# Altium PCB 高压小功率FOC驱动板.PcbDoc (part 1 of 2)
Units mm, origin at the board's own origin, x right, y up, seen from the top; angles counter-clockwise.
Board outline 64 x 64 mm, 4 copper layers (Top Layer, Mid-Layer 1, Mid-Layer 2, Bottom Layer), stack 2.282 mm thick; 170 components, 96 nets, 418 pads, 185 vias.
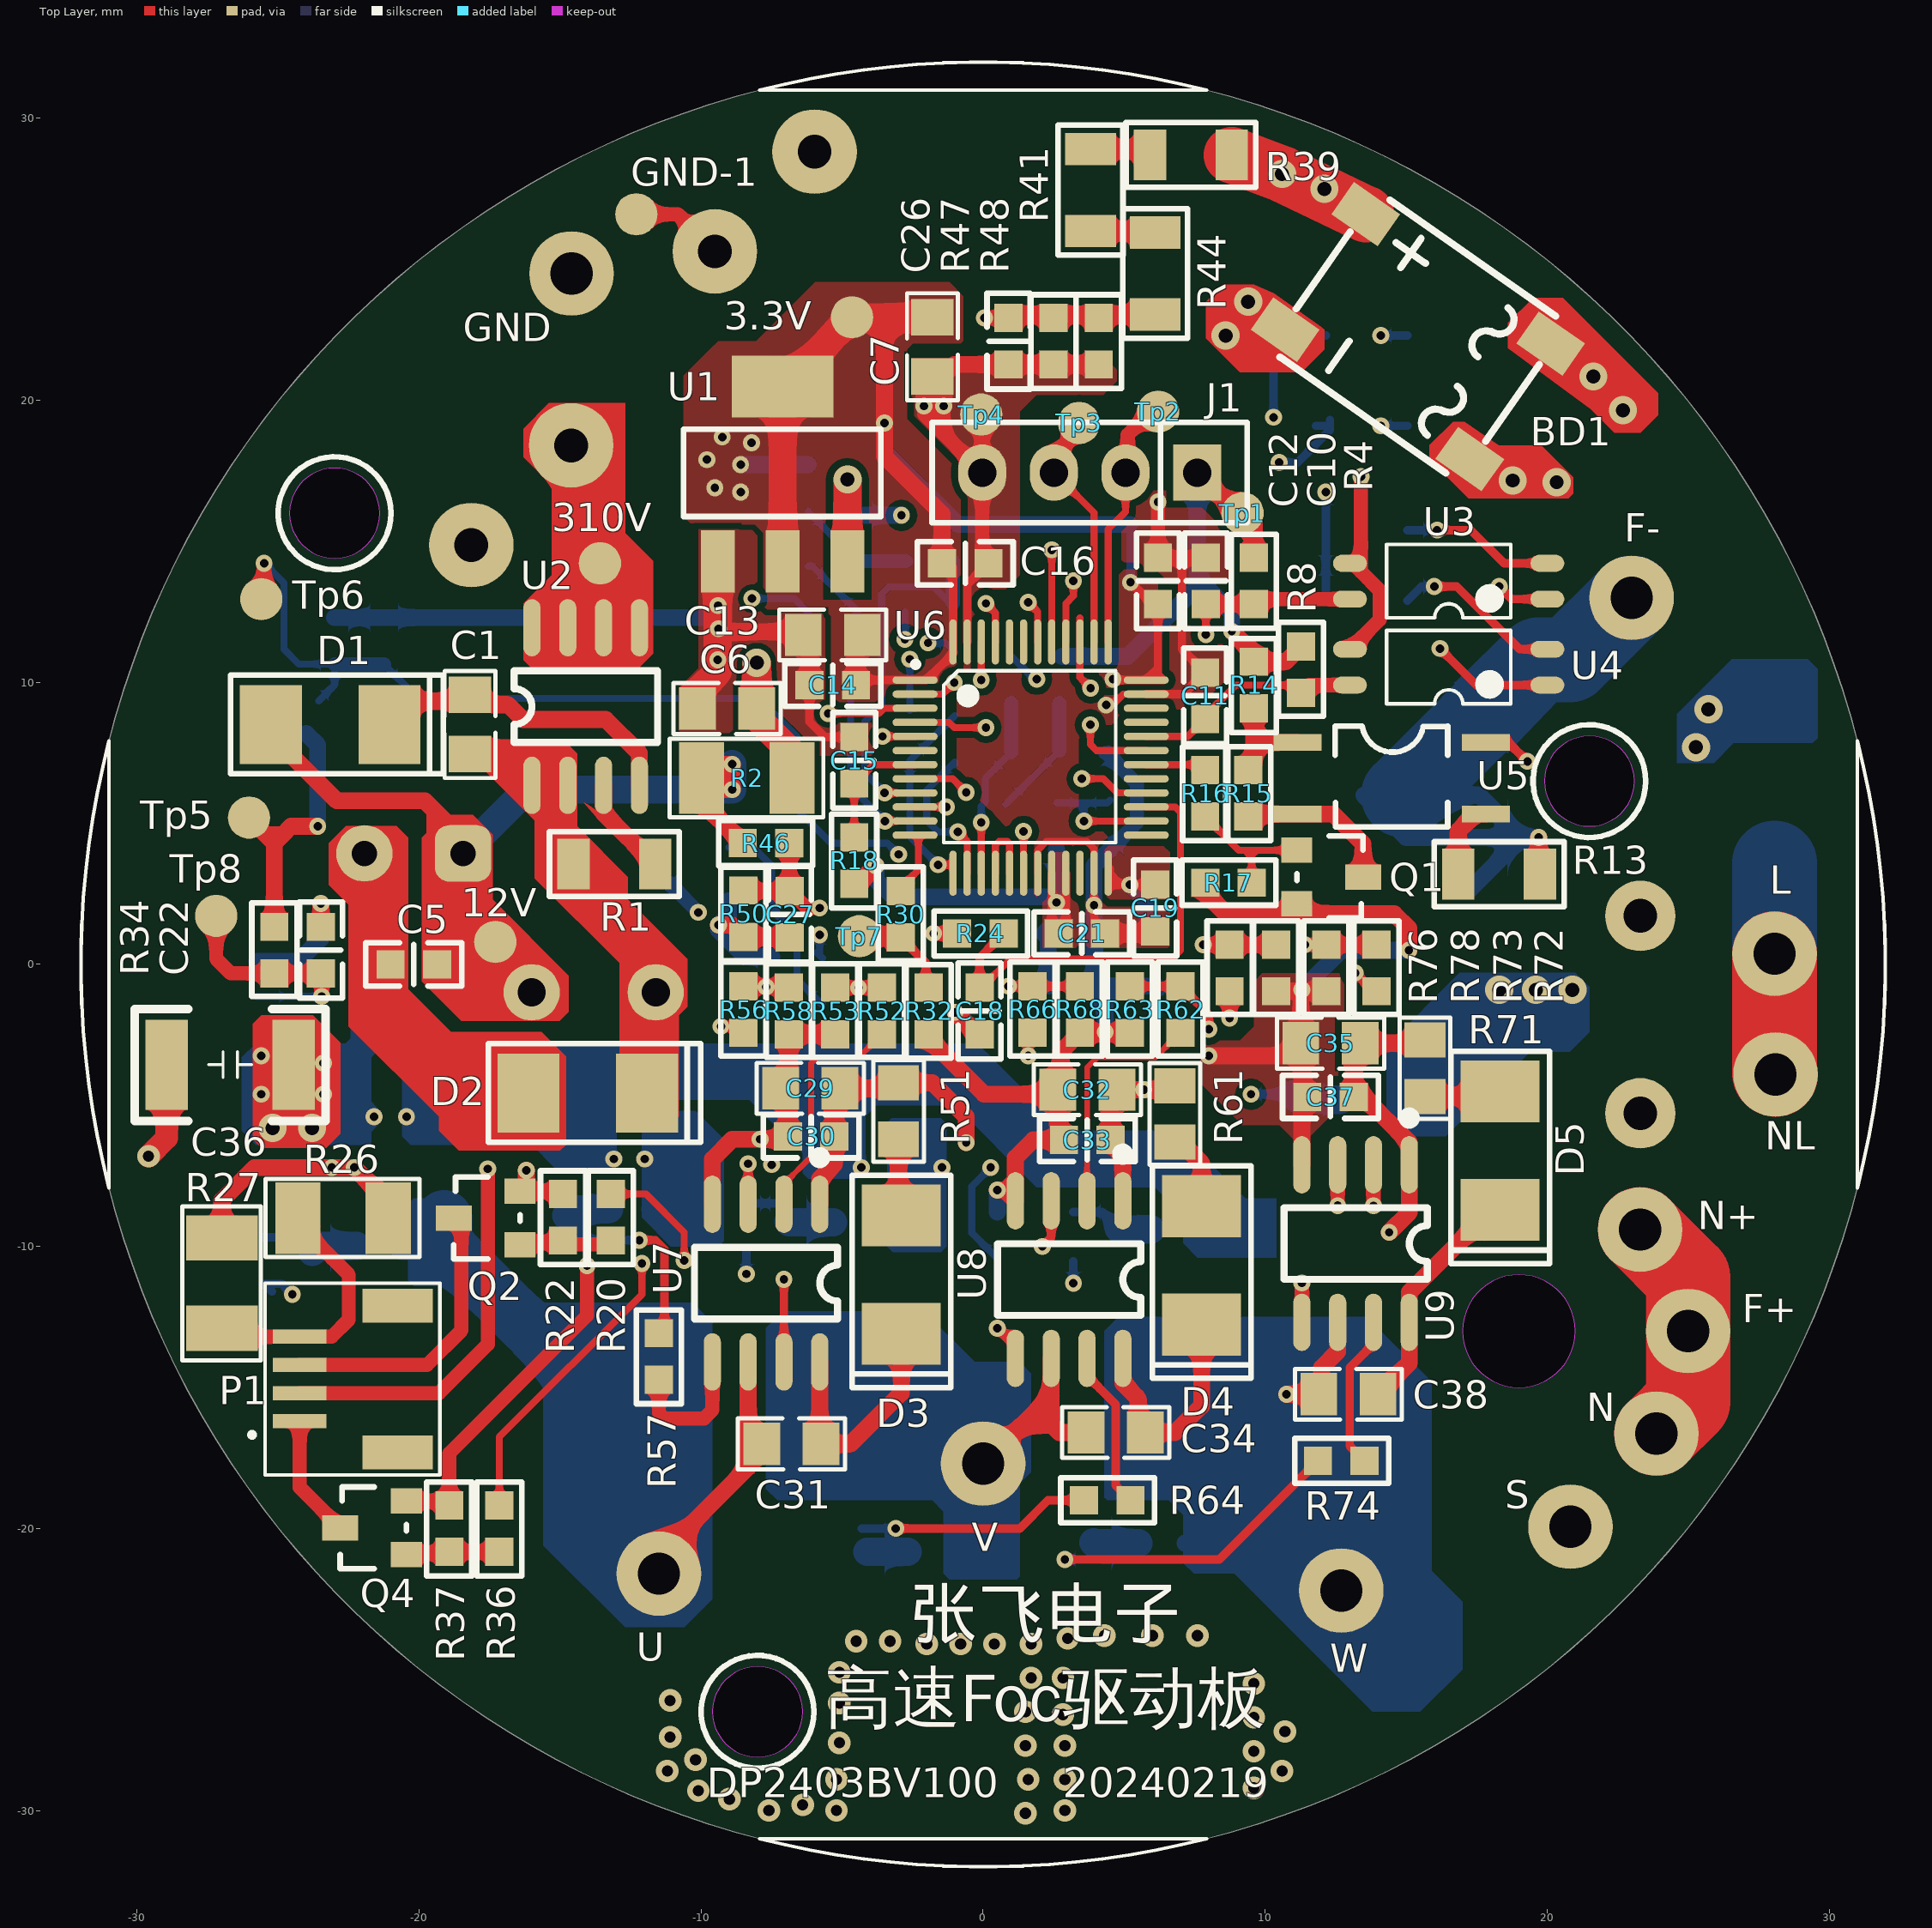
[diagram p0: Top Layer view]
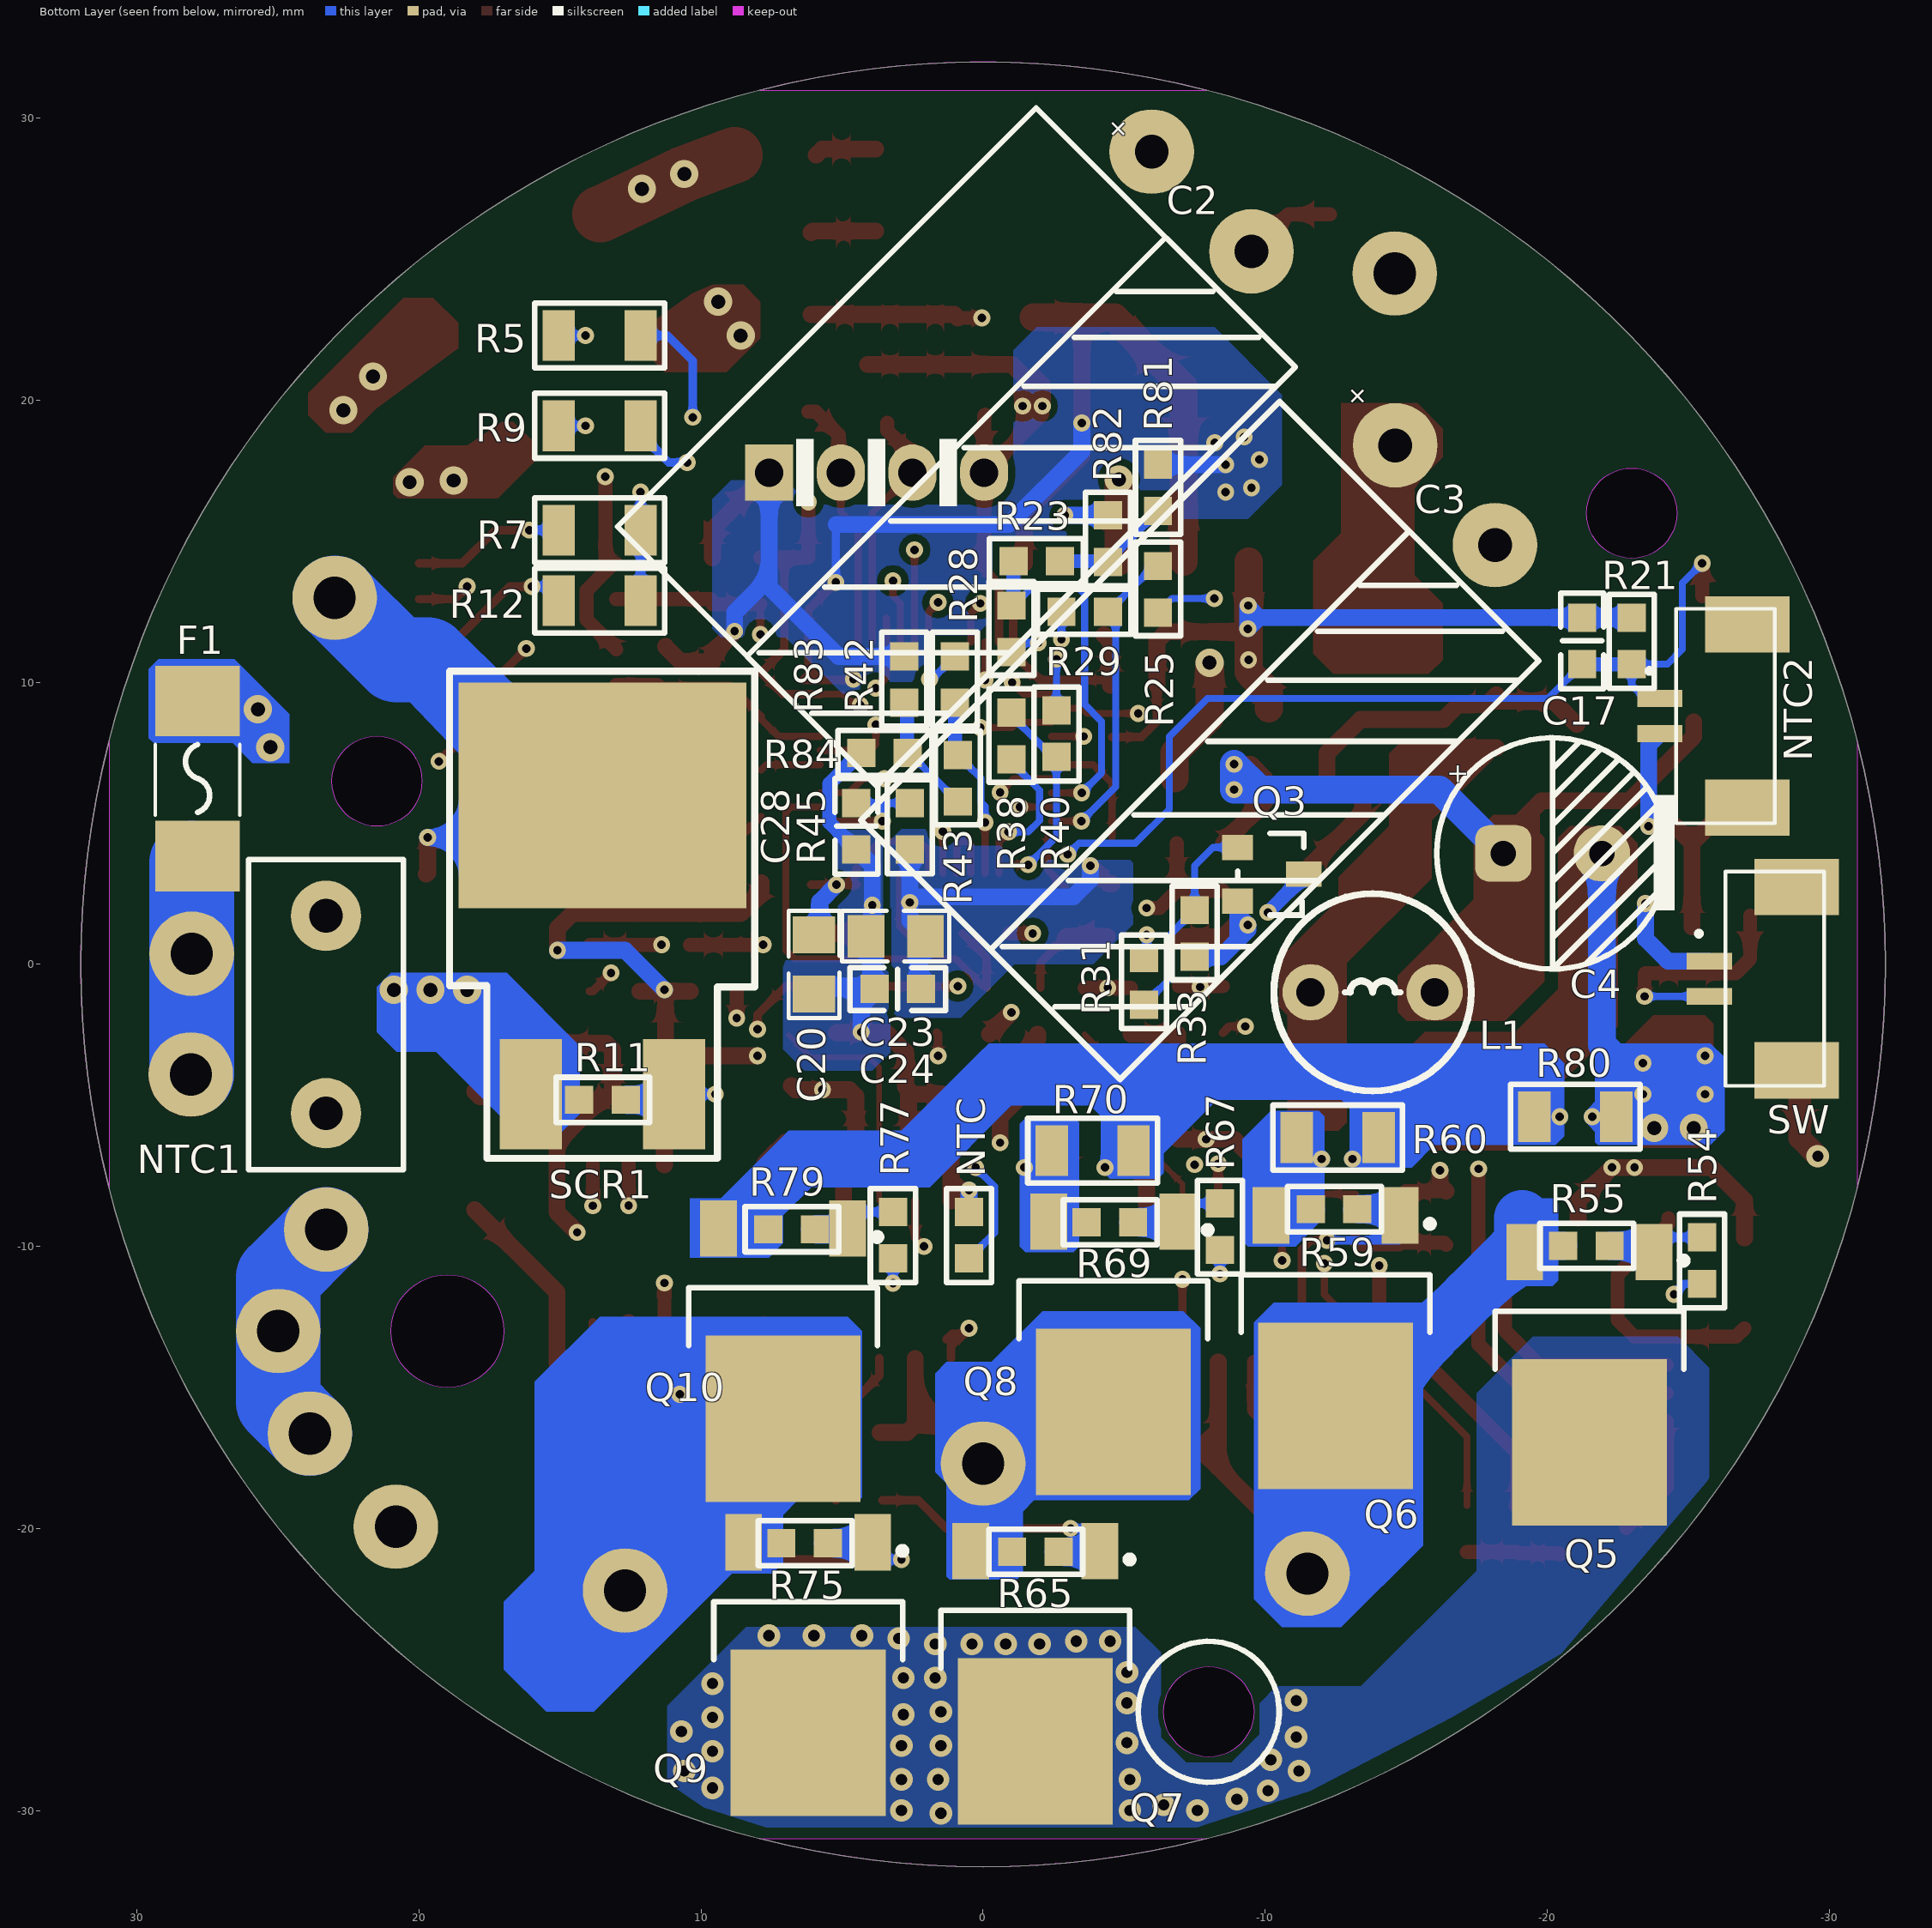
[diagram p1: Bottom Layer view, seen from below]
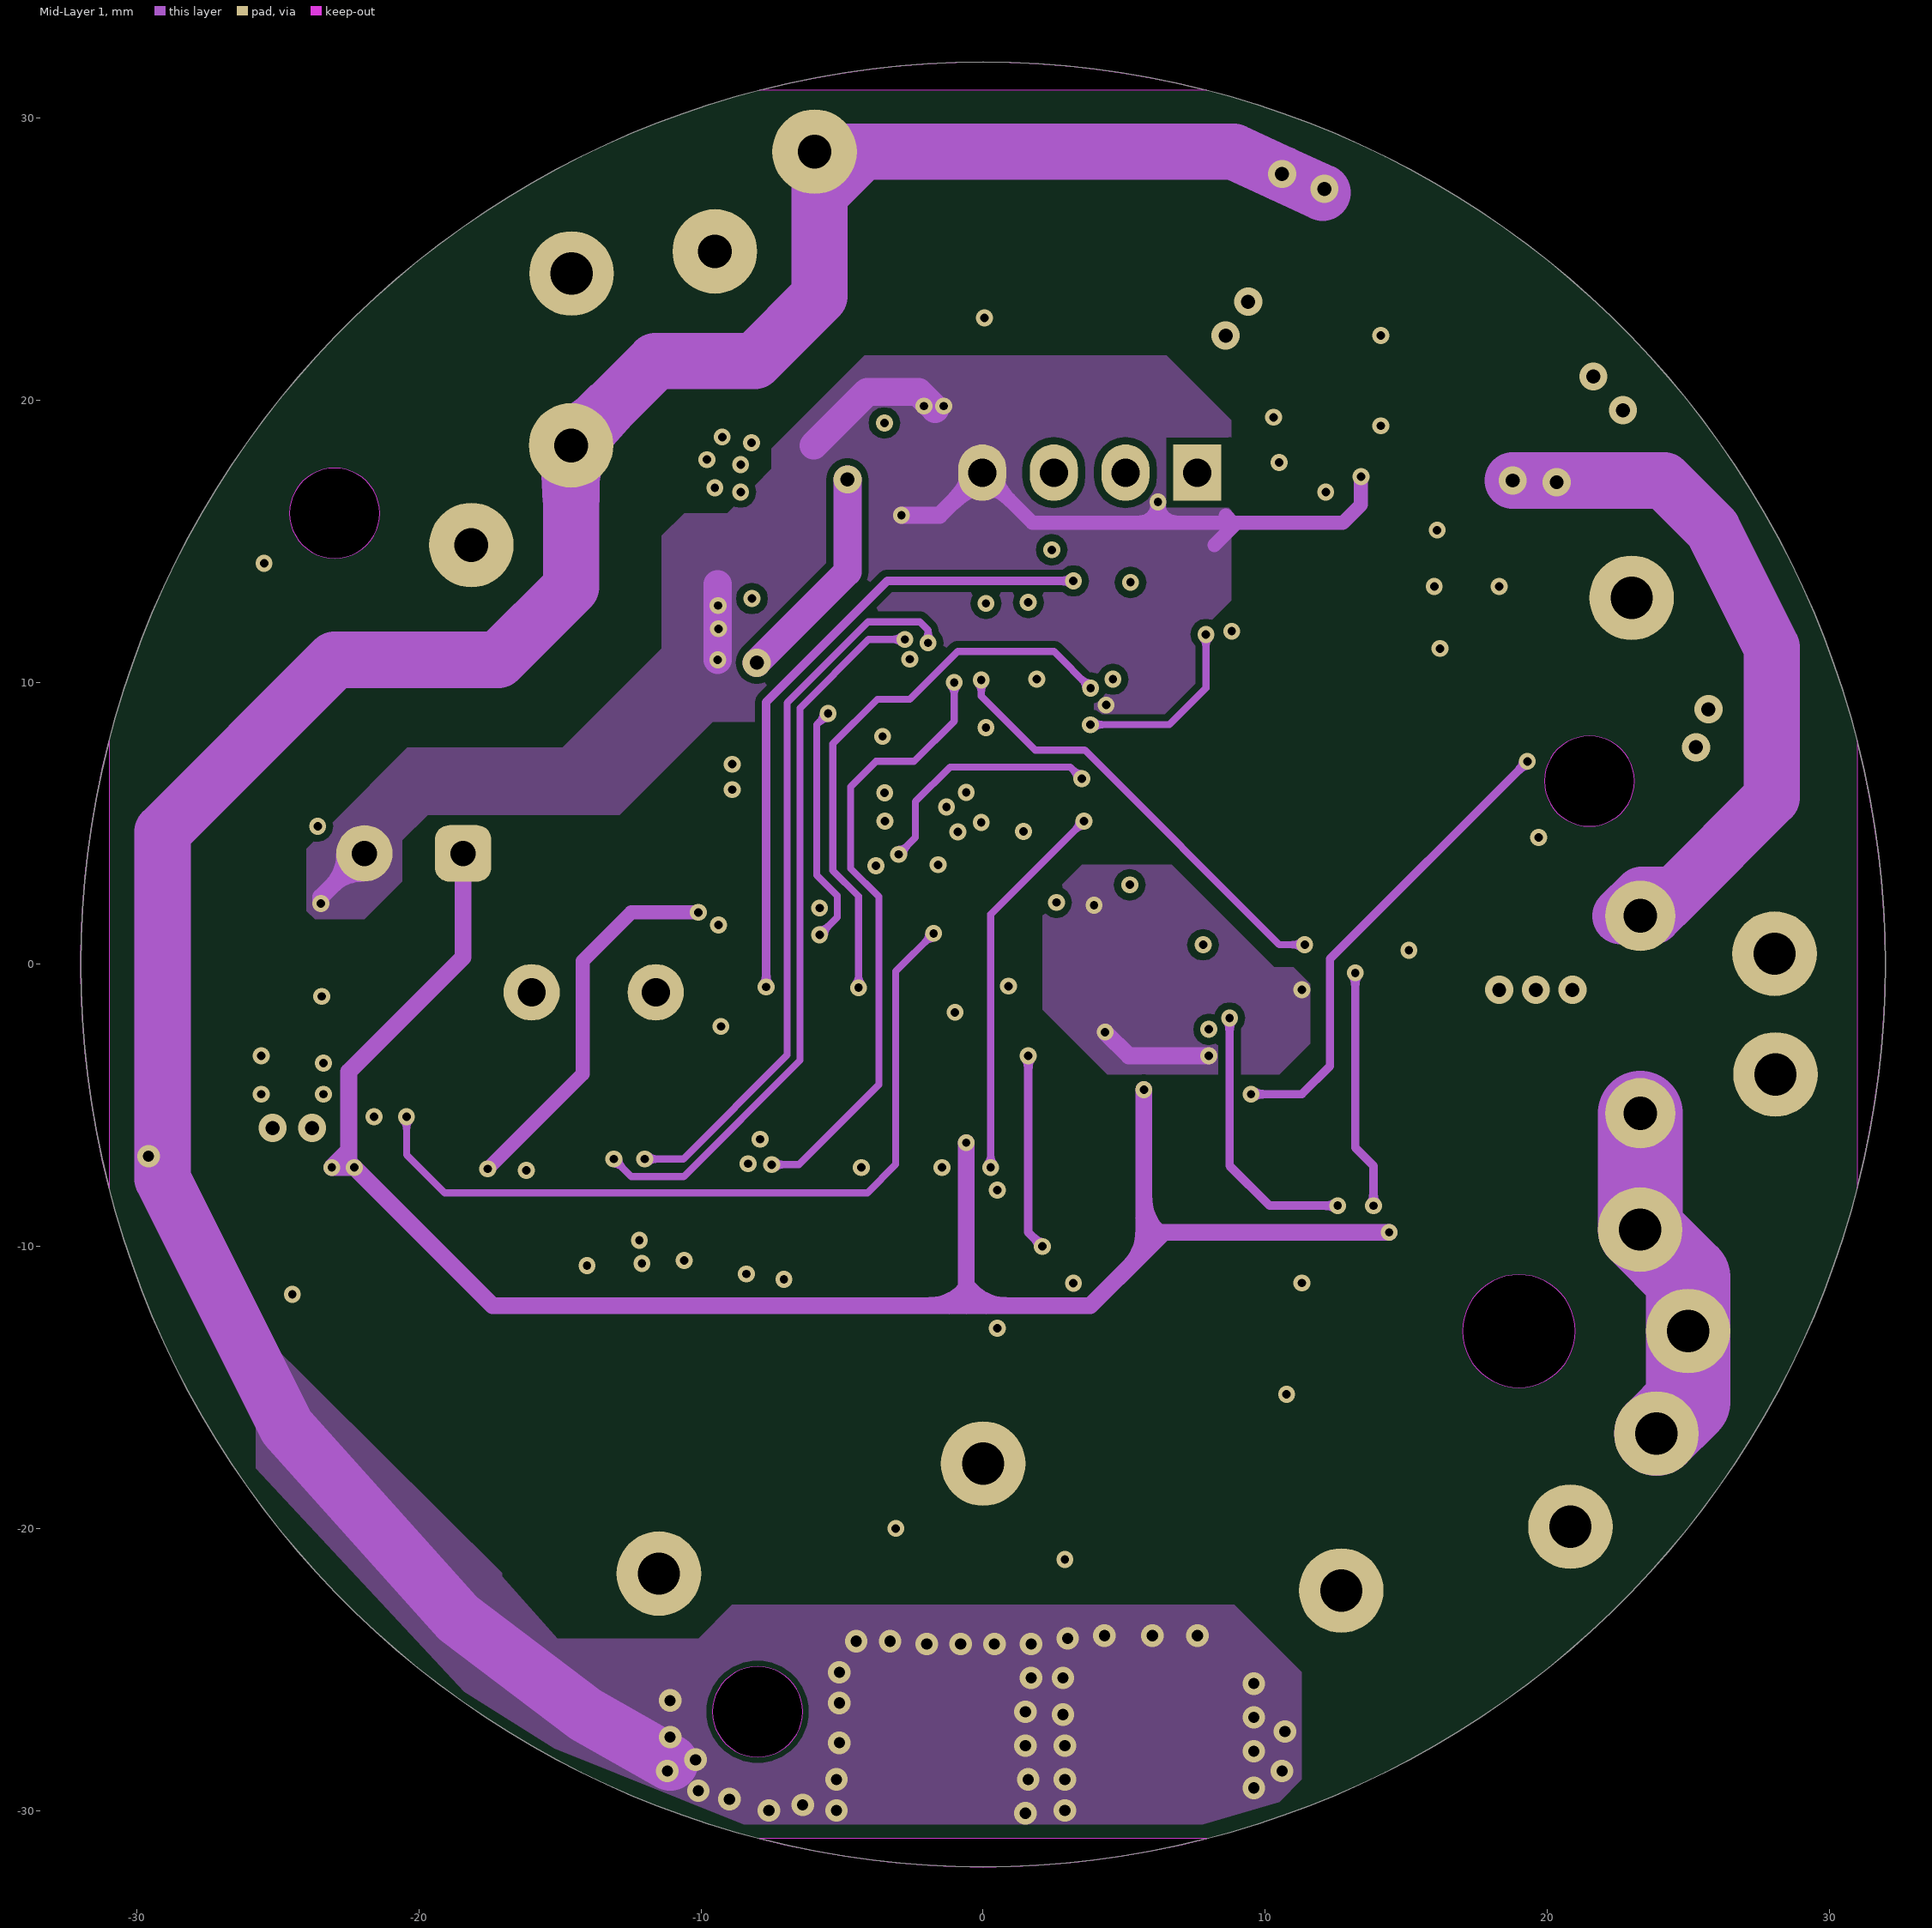
[diagram p2: Mid-Layer 1]
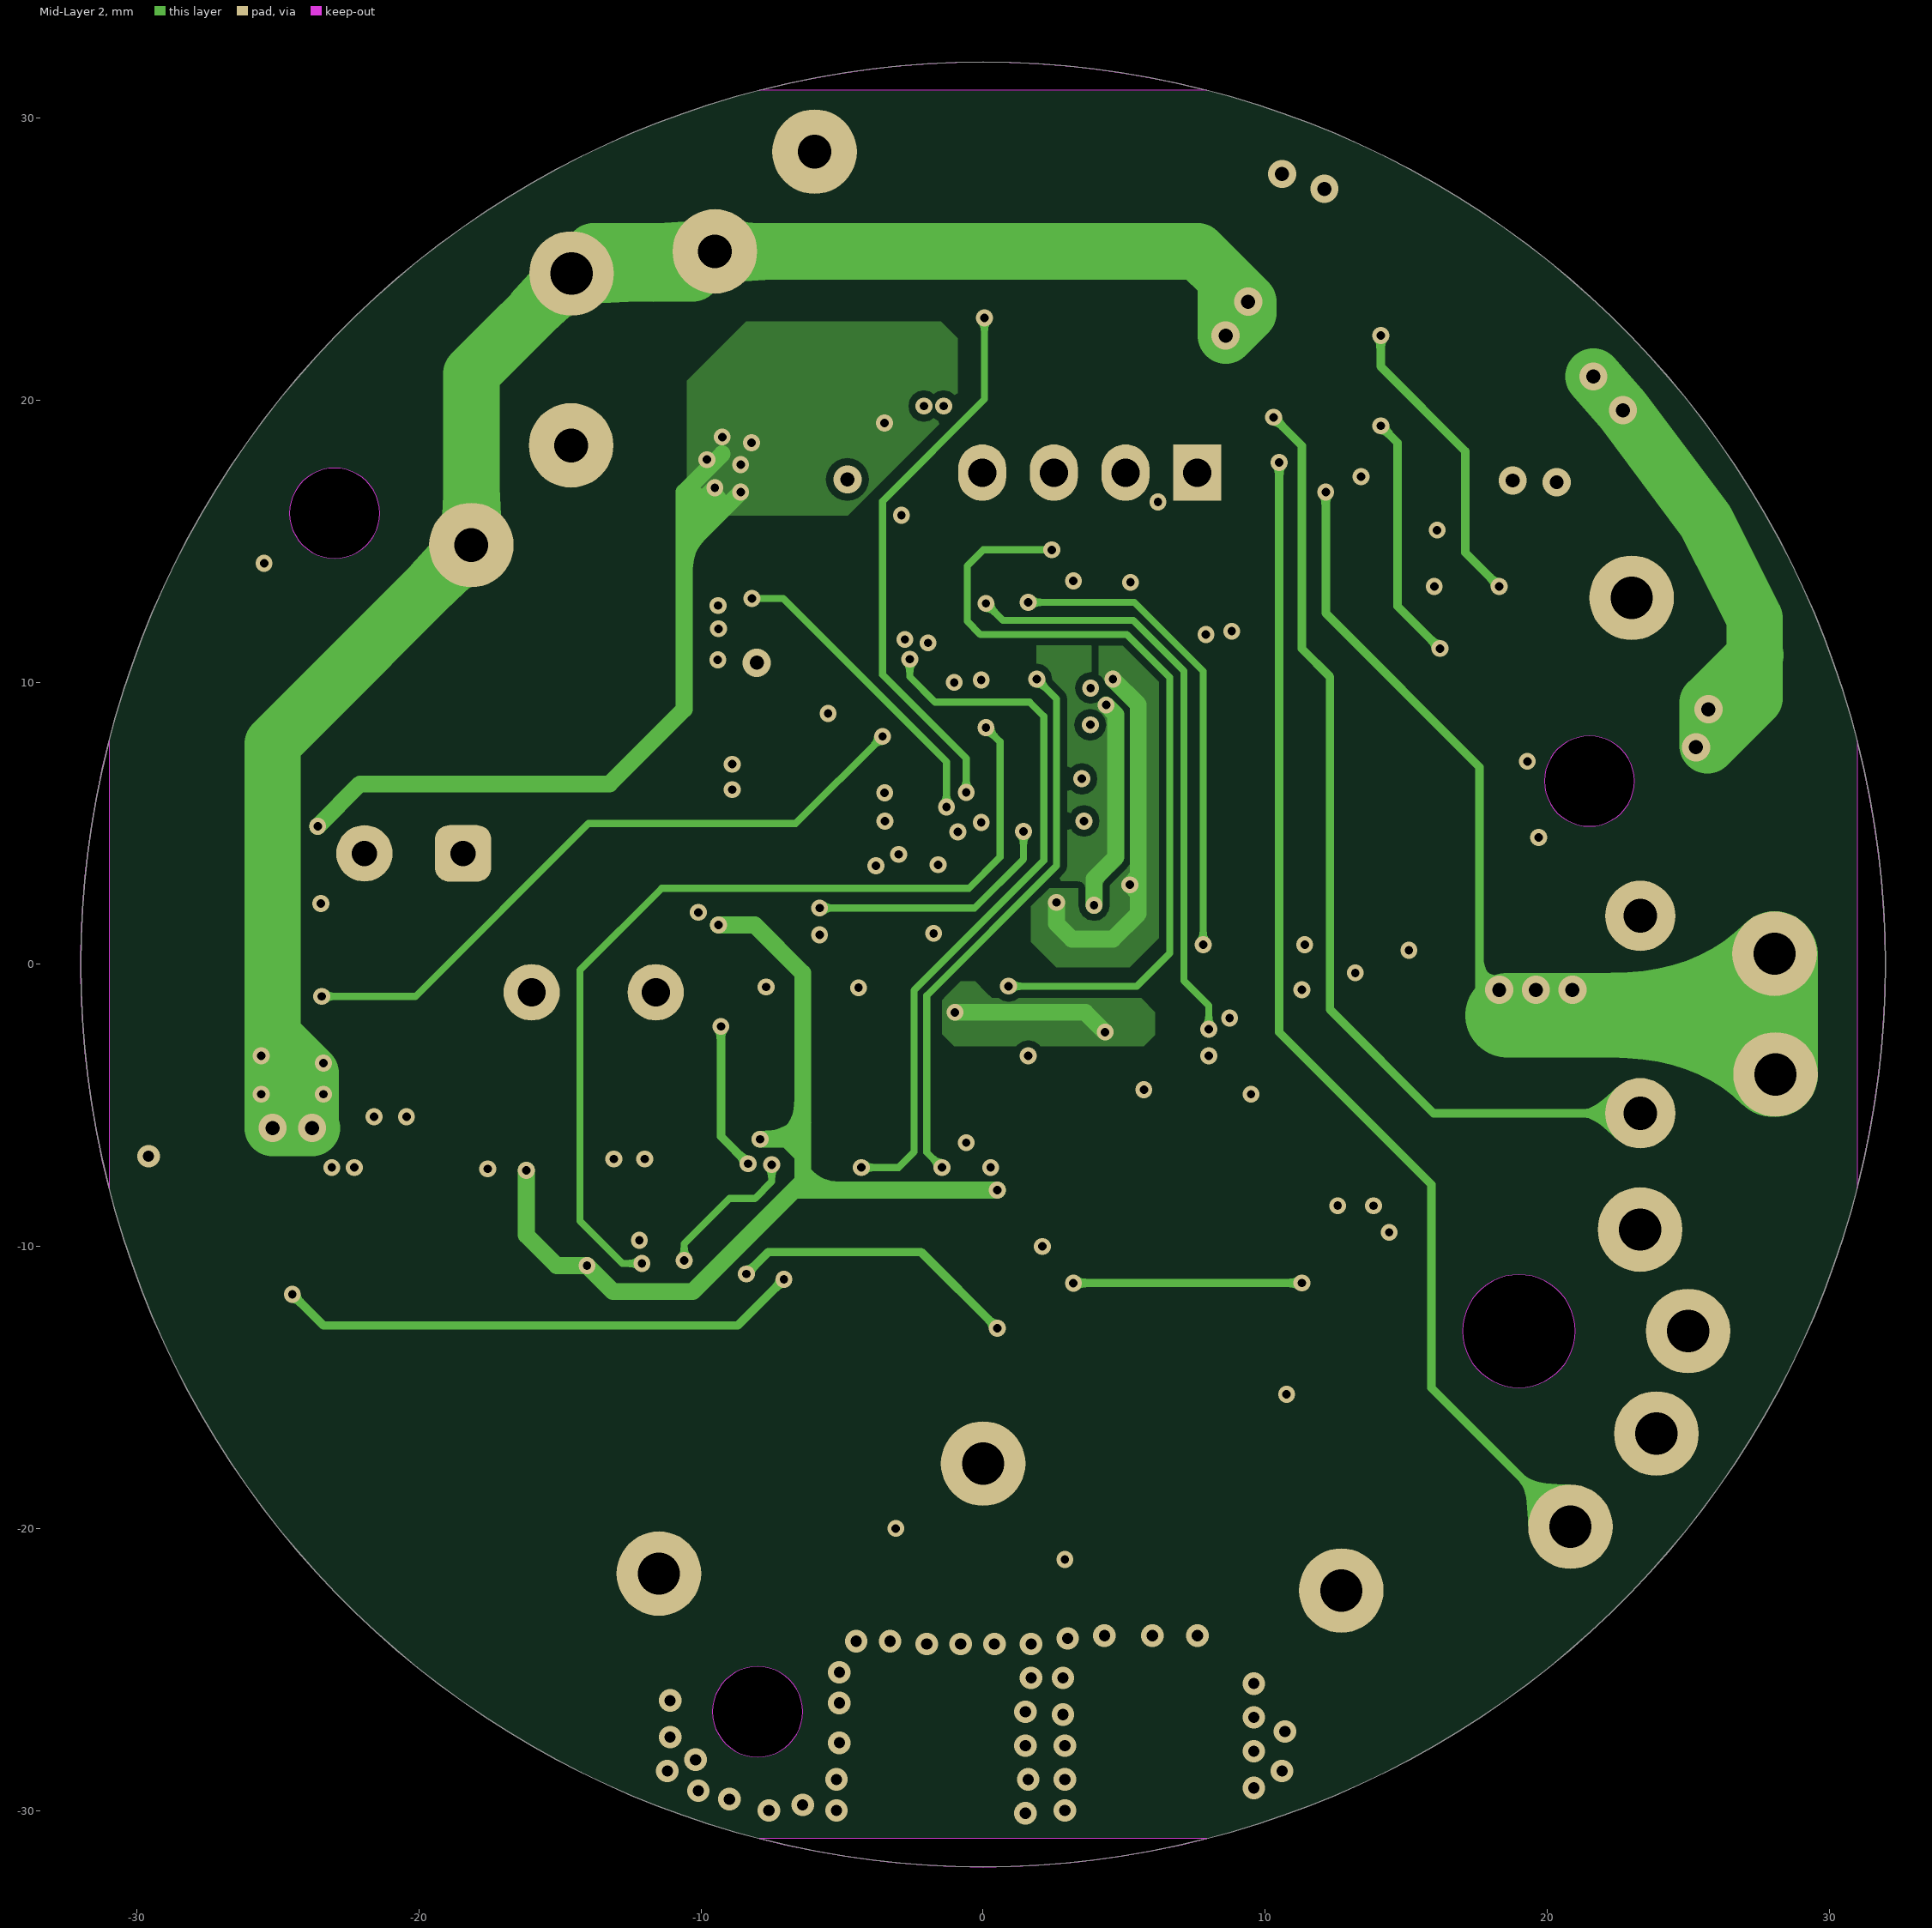
[diagram p3: Mid-Layer 2]

## Layer stack, top to bottom
Top Solder: solder mask 0.0102, Solder Resist, Dk 3.5
Top Layer: signal copper 0.0356
Dielectric1: core 1.5, FR-4, Dk 4.8
Mid-Layer 1: signal copper 0.0356
Dielectric2: prepreg 0.32, FR-4, Dk 4.8
Mid-Layer 2: signal copper 0.0356
Dielectric3: core 0.32, FR-4, Dk 4.8
Bottom Layer: signal copper 0.0356
Bottom Solder: solder mask 0.0102, Solder Resist, Dk 3.5

## Board outline
-32,0 ccw(c0,0) 0,-32 ccw(c0,0) 32,0 ccw(c0,0) 0,32 ccw(c0,0)
cut-out: -7.93,-31 ccw(c0,0) 7.93,-31
cut-out: -7.93,31 cw(c0,0) 7.93,31
cut-out: -31,-7.93 cw(c0,0) -31,7.93
cut-out: -24.6,16 ccw(c-23,16) -23,14.4 ccw(c-23,16) -21.4,16 ccw(c-23,16) -23,17.6 ccw(c-23,16)
cut-out: 19.9,6.5 ccw(c21.5,6.5) 21.5,4.9 ccw(c21.5,6.5) 23.1,6.5 ccw(c21.5,6.5) 21.5,8.1 ccw(c21.5,6.5)
cut-out: 17,-13 ccw(c19,-13) 19,-15 ccw(c19,-13) 21,-13 ccw(c19,-13) 19,-11 ccw(c19,-13)
cut-out: -9.6,-26.5 ccw(c-8,-26.5) -8,-28.1 ccw(c-8,-26.5) -6.4,-26.5 ccw(c-8,-26.5) -8,-24.9 ccw(c-8,-26.5)
cut-out: 31,-7.93 ccw(c0,0) 31,7.93

## Design rules (kind name [scope] priority, off if disabled: settings)
Clearance [All] p1: gap=0.2
ComponentClearance [All] p1 off: gap=0.254 collisioncheckmode=3 verticalgap=0.254 showdistances=FALSE
MinimumSolderMaskSliver [All] p1 off: minsoldermaskwidth=0.254
PolygonConnect [All] p1: connectstyle=Direct reliefconductorwidth=0.254 reliefentries=4 polygonreliefangle="90 Angle" airgapwidth=0.254
RoutingVias [All] p1: holewidth=0.4 width=0.8 viastyle="Through Hole" minholewidth=0.3 minwidth=0.6 maxholewidth=0.5 maxwidth=1
SilkToSilkClearance [All] p1 off: silktosilkclearance=0.254
SilkToSolderMaskClearance [IsPad] p1 off: minsilkscreentomaskgap=0.254 clearancetoexposedcopper=TRUE
SolderMaskExpansion [All] p1: expansion=0.102
Width [All] p1: maxlimit=3 minlimit=0.2 preferedwidth=0.254
26 further rules are at their usual default settings.

## Classes and differential pairs
component class U_3-高压小功率FOC驱动板: C29 C30 C31 C32 C33 C34 C35 C36 C37 C38 D3 D4 D5 Q5 Q6 Q7 Q8 Q9 Q10 R51 R52 R53 R54 R55 R56 R57 R58 R59 R60 R61 R62 R63 R64 R65 R66 R67 R68 R69 R70 R71 R72 R73 R74 R75 R76 R77 R78 R79 R80 U U7 U8 U9 V W
component class U_2-高压小功率FOC驱动板: C12 C13 C14 C15 C16 C17 C18 C19 C20 C21 C22 C23 C24 C26 C27 C28 J1 NTC NTC2 P1 Q2 Q3 Q4 R18 R20 R21 R22 R23 R24 R25 R26 R27 R28 R29 R30 R31 R32 R33 R34 R36 R37 R38 R39 R40 R41 R42 R43 R44 R45 R46 R47 R48 R50 R81 R82 R83 R84 SW Tp1 Tp2 Tp3 Tp4 Tp5 Tp6 Tp7 Tp8 U6
component class U_1-高压小功率FOC驱动板: 3.3V 12V 310V BD1 C1 C2 C3 C4 C5 C6 C7 C10 C11 D1 D2 F1 F+ F- GND GND-1 L L1 N N+ NL NTC1 Q1 R1 R2 R4 R5 R7 R8 R9 R11 R12 R13 R14 R15 R16 R17 S SCR1 U1 U2 U3 U4 U5

## Components (designator, comment, footprint, x,y, rotation, side; value= is the part's Value field where it differs from the comment)
3.3V "test point" Test_Port -4.651,22.95 r90 top
12V "test point" Test_Port -17.3,0.8 r90 top
310V "test point" Test_Port -13.589,14.224 r90 top
BD1 "TMBF410" DBF 15.113,22.352 r55 top
C1 "4.7uF/50V" C0805 -18.2,8.509 r270 top
C2 "47uF/400V" D13/L21-5 -7.747,27.051 r225 bottom locked
C3 "47uF/400V" D13/L21-5 -16.383,16.637 r225 bottom locked
C4 "220uF/25V" RB3.5/8.2 -20.193,3.937 r180 bottom
C5 "100nF/50V" C0603 -20.193,0 r180 top
C6 "10uF/25V" C0805 -9.081,9.075 r0 top
C7 "10uF/25V" C0805 -1.8,21.9 r90 top
C10 "1nF/50V" C0603 7.9,13.6 r90 top
C11 "1nF/50V" C0603 7.874,9.525 r90 top
C12 "100nF/50V" C0603 6.2,13.6 r270 top
C13 "10uF/25V" C0805 -5.334,11.684 r0 top
C14 "100nF/50V" C0603 -5.334,9.906 r180 top
C15 "100nF/50V" C0603 -4.572,7.239 r90 top
C16 "100nF/50V" C0603 -0.635,14.224 r180 top
C17 "10nF/50V" C0603 -21.246,11.472 r270 bottom
C18 "4.7nF/50V" C0603 -0.127,-1.651 r270 top
C19 "100nF/50V" C0603 6.1,2 r90 top
C20 "10uF/25V" C0805 6,0 r270 bottom
C21 "10nF/50V" C0603 3.5,1.1 r180 top
C22 "1nF/50V" C0603 -23.487,0.508 r90 top
C23 "10uF/25V" C0805 3.1,1 r0 bottom
C24 "100nF/50V" C0603 3.029,-0.872 r180 bottom
C26 "10nF/50V" C0603 0.9,22.1 r270 top
C27 "1nF/50V" C0603 -6.858,1.778 r270 top
C28 "10nF/50V" C0603 4.5,4.9 r90 bottom
C29 "10uF/25V" C0805 -6.131,-4.391 r180 top
C30 "100nF/50V" C0603 -6.1,-6.1 r0 top
C31 "10uF/25V" C0805 -6.8,-17 r180 top
C32 "10uF/25V" C0805 3.694,-4.445 r180 top
C33 "100nF/50V" C0603 3.694,-6.223 r0 top
C34 "10uF/25V" C0805 4.7,-16.6 r180 top
C35 "10uF/25V" C0805 12.319,-2.794 r180 top
C36 "100nF/1000V" C1812 -28.956,-3.556 r0 top
C37 "100nF/50V" C0603 12.319,-4.699 r0 top
C38 "10uF/25V" C0805 12.954,-15.24 r180 top
D1 "ES1J" DO-214AC(SMA) -23.157,8.509 r0 top
D2 "ES1J" DO-214AC(SMA) -14.023,-4.561 r0 top
D3 "ES1J" DO-214AC(SMA) -2.9,-11 r270 top
D4 "ES1J" DO-214AC(SMA) 7.747,-10.668 r270 top
D5 "ES1J" DO-214AC(SMA) 18.334,-6.604 r270 top
F1 "2A" JFC2410-1200FS 27.86,3.84 r90 bottom
F+ "LT" IGBT-PIN 25,-13 r0 top locked
F- "T1" IGBT-PIN 23,13 r0 top locked
GND "GND" IGBT-PIN -14.6,24.5 r0 top
GND-1 "test point" Test_Port -12.3,26.6 r90 top
J1 "XH2.54-4P" SIP4 7.588,17.439 r180 top
L "L" IGBT-PIN 28.067,0.381 r90 top
L1 "470uH" L4.4/7 -11.6,-1 r180 bottom
N "SL" IGBT-PIN 23.876,-16.637 r90 top
N+ "NA" IGBT-PIN 23.3,-9.4 r0 top
NL "LA" IGBT-PIN 28.1,-3.9 r0 top
NTC "10K" R0603 0.5,-9.6 r90 bottom
NTC1 "NTC5D-7" NTC-5D9 23.306,-1.778 r0 bottom
NTC2 "HCZZ0015-2" PIN-2-LS -25.554,8.809 r270 bottom
P1 "XD-1.0-4PWT" PIN-4-WS -22.5,-14.7 r90 top
Q1 "MMBT3904" SOT-23-BCE 12.3,3.1 r270 top
Q2 "MMBT3904" SOT-23-BCE -17.6,-8.993 r90 top
Q3 "MMBT3904" SOT-23-BCE -10.2,3.2 r270 bottom
Q4 "MMBT3904" SOT-23-BCE -21.628,-19.978 r90 top
Q5 "MOT5N50D" TO-252AA -21.5,-14.8 r270 bottom
Q6 "MOT5N50D" TO-252AA -12.5,-13.5 r270 bottom
Q7 "MOT5N50D" TO-252AA -1.851,-25.4 r270 bottom
Q8 "MOT5N50D" TO-252AA -4.618,-13.716 r270 bottom
Q9 "MOT5N50D" TO-252AA 6.204,-25.095 r270 bottom
Q10 "MOT5N50D" TO-252AA 7.096,-13.965 r270 bottom
R1 "NC" R1206 -13.081,3.556 r0 top
R2 "100R/1210" R1210 -8.382,6.604 r180 top
R4 "10K" R0603 9.6,13.6 r90 top
R5 "180K/1206" R1206 13.6,22.3 r0 bottom
R7 "180K/1206" R1206 13.6,15.4 r0 bottom
R8 "10K" R0603 11.269,10.45 r270 top
R9 "180K/1206" R1206 13.6,19.1 r0 bottom
R11 "150R/0603" R0603 13.5,-4.8 r0 bottom
R12 "180K/1206" R1206 13.6,12.9 r0 bottom
R13 "150R/1206" R1206 18.3,3.2 r180 top
R14 "300R" R0603 9.6,9.906 r90 top
R15 "2K" R0603 9.398,6.069 r90 top
R16 "2K" R0603 7.874,6.069 r90 top
R17 "1K" R0603 8.7,2.9 r180 top
R18 "10K" R0603 -4.572,3.683 r90 top
R20 "2K" R0603 -13.2,-8.965 r90 top
R21 "3K" R0603 -23,11.472 r90 bottom
R22 "1K" R0603 -14.9,-8.965 r90 top
R23 "100K" R0603 -1.9,14.3 r180 bottom
R24 "1K" R0603 -0.1,1.1 r180 top
R25 "100K" R0603 -6.2,13.3 r270 bottom
R26 "1K/1210" R1210 -22.7,-9 r180 top
R27 "1K/1210" R1210 -27,-11.3 r270 top
R28 "10K" R0603 -1,11.9 r270 bottom
R29 "10K" R0603 -3.6,12.5 r180 bottom
R30 "100R" R0603 -2.921,1.778 r270 top
R31 "2K" R0603 -5.7,-0.6 r90 bottom
R32 "10K" R0603 -1.932,-1.651 r90 top
R33 "1K" R0603 -7.5,1.1 r270 bottom
R34 "3K" R0603 -25.138,0.508 r270 top
R36 "2K" R0603 -17.156,-20.005 r90 top
R37 "1K" R0603 -18.934,-20.005 r90 top
R38 "100K" R0603 -1,8.1 r270 bottom
R39 "100K/1206" R1206 7.366,28.702 r180 top
R40 "10K" R0603 -2.6,8.184 r90 bottom
R41 "100K/1206" R1206 3.81,27.459 r270 top
R42 "10K" R0603 1,10.1 r270 bottom
R43 "100K" R0603 0.9,6.6 r270 bottom
R44 "100K/1206" R1206 6.1,24.5 r270 top
R45 "3K" R0603 2.6,4.9 r90 bottom
R46 "10K" R0603 -7.7,4.3 r0 top
R47 "2K4" R0603 2.5,22.1 r90 top
R48 "NC" R0603 4.1,22.1 r90 top
R50 "2K" R0603 -8.5,1.8 r90 top
R51 "10Ω±1%" R0805 -3,-5.2 r270 top
R52 "100R" R0603 -3.594,-1.651 r270 top
R53 "3K" R0603 -5.245,-1.651 r270 top
R54 "470Ω±1%" R0603 -25.5,-10.5 r90 bottom
R55 "10K" R0603 -21.393,-9.979 r0 bottom
R56 "100R" R0603 -8.5,-1.6 r270 top
R57 "470Ω±1%" R0603 -11.5,-13.9 r90 top
R58 "3K" R0603 -6.896,-1.651 r270 top
R59 "10K" R0603 -12.446,-8.679 r0 bottom
R60 "0.3Ω±1%" R1206 -12.573,-6.139 r0 bottom
R61 "10Ω±1%" R0805 6.8,-5.3 r270 top
R62 "100R" R0603 7,-1.6 r270 top
R63 "3K" R0603 5.2,-1.6 r270 top
R64 "470Ω±1%" R0603 4.4,-19 r180 top
R65 "10K" R0603 -1.851,-20.828 r0 bottom
R66 "100R" R0603 1.751,-1.597 r270 top
R67 "470Ω±1%" R0603 -8.4,-9.3 r90 bottom
R68 "3K" R0603 3.429,-1.597 r270 top
R69 "10K" R0603 -4.491,-9.144 r0 bottom
R70 "0.3Ω±1%" R1206 -3.883,-6.604 r0 bottom
R71 "10Ω±1%" R0805 15.667,-3.683 r270 top
R72 "100R" R0603 13.948,-0.127 r270 top
R73 "3K" R0603 12.17,-0.127 r270 top
R74 "470Ω±1%" R0603 12.7,-17.6 r180 top
R75 "10K" R0603 6.331,-20.523 r0 bottom
R76 "100R" R0603 8.741,-0.127 r270 top
R77 "470Ω±1%" R0603 3.2,-9.6 r90 bottom
R78 "3K" R0603 10.392,-0.127 r270 top
R79 "10K" R0603 6.796,-9.393 r0 bottom
R80 "0.2Ω±1%" R1206 -21,-5.4 r0 bottom
R81 "2K" R0603 -6.2,16.9 r270 bottom
R82 "2K" R0603 -4.425,15.1 r90 bottom
R83 "2K" R0603 2.8,10.1 r270 bottom
R84 "2K" R0603 3.5,7.5 r0 bottom
S "SH" IGBT-PIN 20.828,-19.939 r90 top
SCR1 "BTB16-800CW" TO-263 13.5,6 r180 bottom
SW "HCZZ0015-2" PIN-2-LS -27.305,-0.508 r270 bottom
Tp1 "test point" Test_Port 9.2,16 r0 top
Tp2 "test point" Test_Port 6.204,19.6 r0 top
Tp3 "test point" Test_Port 3.4,19.2 r0 top
Tp4 "test point" Test_Port -0.067,19.5 r0 top
Tp5 "test point" Test_Port -26.035,5.207 r0 top
Tp6 "test point" Test_Port -25.6,12.954 r0 top
Tp7 "test point" Test_Port -4.4,1 r0 top
Tp8 "test point" Test_Port -27.2,1.722 r0 top
U "U" IGBT-PIN -11.5,-21.6 r90 top
U1 "AMS1117-3.3V" SOT-223 -7.112,17.272 r0 top
U2 "SDH8322STR" "SOIC-8 - duplicate" -14.097,9.144 r0 top
U3 "OR-3H4A-TP-G" dip4s 16.51,13.589 r180 top
U4 "OR-3H4A-TP-G" dip4s 16.51,10.541 r180 top
U5 "OR-M3052" SO-4 14.478,6.604 r0 top
U6 "STM32G431CBT6" LQFP-48 3.683,5.334 r0 top
U7 "EG2106" SOIC-8 -7.7,-11.3 r270 top
U8 "EG2106" SOIC-8 3.048,-11.176 r270 top
U9 "EG2106" SOIC-8 13.208,-9.898 r270 top
V "V" IGBT-PIN 0,-17.7 r90 top
W "W" IGBT-PIN 12.7,-22.2 r90 top

## Footprints (in the part's own frame and the unit in brackets; to place one, negate y for a bottom-side part, rotate by r counter-clockwise, add the part's x,y. Pads: shape width x height; smd on the part's side, far side on the other; paste and mask are expansions set on the pad)
C0603 [mm]
  rect 1x1 smd: 1(-0.825,0) 2(0.825,0)
  silkscreen extent -1.7,-0.76 1.7,0.76
C0805 [mm] "IPC STD 0805 CHIP CAPACITOR"
  rect 1.3x1.5 smd: 1(-1.05,0) 2(1.05,0)
  silkscreen extent -1.9,-0.9 1.9,0.9
C1812 [mm] "IPC STD 1206 CHIP CAPACITOR"
  rect 1.5x3.2 smd: 1(0,0) 2(4.5,0)
  silkscreen extent -1.13,-2 5.63,1.98
D13/L21-5 [mm] "P=5mm,D=13mm,L=21mm"
  round 3 hole 1.2: 1(-2.5,0) 2(2.5,0)
  silkscreen extent -6.5,-22.8 6.5,-1.8, body extent -6.5,-22.8 6.5,-1.8, height 15
DBF [mm]
  rect 1.4x2 smd mask+0.051: 1(2.6,3.7) 2(2.6,-4.3) 3(-2.4,-4.3) 4(-2.4,3.7)
  silkscreen extent -3.3,-4.4 3.5,3.8
dip4s [mm]
  oval 1.2x0.6 smd: 1(-3.5,0.635) 2(-3.5,-0.635) 3(3.5,-0.635) 4(3.5,0.635)
  silkscreen extent -2.2,-1.3 2.2,1.3
DO-214AC(SMA) [mm] "(DO-214)/M1-M7(1N4001-4007)/1SMA4741-1SMA200Z(DO-214AC)"
  rect 2.2x2.8 smd: A(-2.1,0) K(2.1,0)
  silkscreen extent -3.53,-1.75 4.01,1.75
IGBT-PIN [mm] "D=1mm"
  round 3 hole 1.5: 1(0,0)
JFC2410-1200FS [mm] "2A,250V"
  rect 2.5x3 smd: 1(0,0) 2(5.5,0)
  silkscreen extent 1.45,-1.5 3.95,1.5
L4.4/7 [mm] "4.7mH"
  round 2 hole 1: 1(0.012,0.011) 2(4.412,0.011)
  silkscreen extent -1.29,-3.49 5.71,3.51
LQFP-48 [mm] "14*14mm"
  oval 1.6x0.26 smd: 1(-6.1,4.75) 2(-6.1,4.25) 3(-6.1,3.75) 4(-6.1,3.25) 5(-6.1,2.75) 6(-6.1,2.25) 7(-6.1,1.75) 8(-6.1,1.25) 9(-6.1,0.75) 10(-6.1,0.25) 11(-6.1,-0.25) 12(-6.1,-0.75) 25(2.1,-0.75) 26(2.1,-0.25) 27(2.1,0.25) 28(2.1,0.75) 29(2.1,1.25) 30(2.1,1.75) 31(2.1,2.25) 32(2.1,2.75) 33(2.1,3.25) 34(2.1,3.75) 35(2.1,4.25) 36(2.1,4.75)
  oval 0.26x1.6 smd: 13(-4.75,-2.1) 14(-4.25,-2.1) 15(-3.75,-2.1) 16(-3.25,-2.1) 17(-2.75,-2.1) 18(-2.25,-2.1) 19(-1.75,-2.1) 20(-1.25,-2.1) 21(-0.75,-2.1) 22(-0.25,-2.1) 23(0.25,-2.1) 24(0.75,-2.1) 37(0.75,6.1) 38(0.25,6.1) 39(-0.25,6.1) 40(-0.75,6.1) 41(-1.25,6.1) 42(-1.75,6.1) 43(-2.25,6.1) 44(-2.75,6.1) 45(-3.25,6.1) 46(-3.75,6.1) 47(-4.25,6.1) 48(-4.75,6.1)
  silkscreen extent -6.18,-1.02 1.02,5.41
NTC-5D9 [mm] "11mm*5.5mm*15.5mm，PIN=7mm"
  round 2.5 hole 1.2: 1(0,3.5) 2(0,-3.5)
  silkscreen extent -2.75,-5.5 2.75,5.5, body extent -2.75,-5.5 2.75,5.5, height 15.5
PIN-2-LS [mm] "1.25mm"
  rect 0.6x1.6 smd: 1(-0.625,-1.55) 2(0.625,-1.55)
  rect 2x3 smd: Z0(-3.25,1.55) Z0(3.25,1.55)
  silkscreen extent -3.8,-2 3.8,2.52, body extent -3.8,-0.98 3.8,2.52, height 4.7
PIN-4-WS [mm] "XD-1.0-4PWT,1.0mm"
  rect 0.5x1.9 smd: 1(-1.5,1.738) 2(-0.5,1.738) 3(0.5,1.738) 4(1.5,1.738)
  rect 1.2x2.5 smd: Z0(-2.6,-1.737) Z0(2.6,-1.737)
  silkscreen extent -3.4,-3.24 3.4,3.5, body extent -3.4,-3.24 3.4,2.96, height 3.13
R0603 [mm]
  rect 1x1 smd: 1(-0.825,0) 2(0.825,0)
  silkscreen extent -1.68,-0.8 1.65,0.8
R0805 [mm] "1/8W"
  rect 1.25x1.45 smd: 1(-1,0) 2(1,0)
  silkscreen extent -1.8,-0.9 1.8,0.9
R1206 [mm] "1/4W"
  rect 1.15x1.8 smd: 1(-1.45,0) 2(1.45,0)
  silkscreen extent -2.3,-1.15 2.3,1.15
R1210 [mm]
  rect 1.6x2.54 smd: 1(-1.6,0) 2(1.6,0)
  silkscreen extent -2.72,-1.4 2.75,1.38
RB3.5/8.2 [mm] "KM Series, Pinth 3.5mm, diameter 8.2mm, height 12.6mm."
  rrect50% 2x2 hole 0.9: 1(-1.75,0)
  round 2 hole 0.9: 2(1.75,0)
  silkscreen extent -4.1,-4.1 4.34,4.1
SIP4 [mm]
  rect 1.7x2 hole 1: 1(0,0)
  oval 1.7x2 hole 1: 2(2.54,0) 3(5.08,0) 4(7.62,0)
  silkscreen extent -1.78,-1.78 9.4,1.78
SO-4 [mm]
  rect 1.7x0.6 smd: 1(-3.327,1.27) 2(-3.327,-1.27) 3(3.348,-1.27) 4(3.348,1.27)
  silkscreen extent -2,-1.73 2,1.85
SOIC-8 [mil] "8 Pin SOIC - IPC STD 1.75mm tall"
  oval 80x24 smd: 1(-110.04,75) 2(-110.04,25) 3(-110.04,-25) 4(-110.04,-75) 5(109.96,-75) 6(109.96,-25) 7(109.96,25) 8(109.96,75)
  silkscreen extent -181,-100 50,100
"SOIC-8 - duplicate" [mil]
  oval 24x80 smd: 1(-75,-110) 2(-25,-110) 3(25,-110) 4(75,-110) 5(75,110) 6(25,110) 7(-25,110) 8(-75,110)
  silkscreen extent -100,-50 100,50, body extent -97,-122 96,120, height 70
SOT-23-BCE [mm] "BC847/BC857/MMBT3904/MMBT3906"
  rect 0.9x1.1 smd: B(-0.95,-1.175) E(0.95,-1.175)
  rect 0.9x1.27 smd: C(0,1.175)
  silkscreen extent -1.45,-1.17 1.45,1.17
SOT-223 [mm]
  rect 1.2x2.2 smd: 1(-2.3,-2.983) 2(0,-2.983) 3(2.3,-2.983)
  rect 3.6x2.2 smd: 2(0,3.217)
  silkscreen extent -3.51,-1.39 3.49,1.71
Test_Port [mm]
  round 1.5 smd: 1(0,0)
TO-252AA [mm] "TI,D-PAK, 3-Pads, Body 6.21x6.73mm (max), IPC Medium Density"
  rect 5.9x5.5 smd: D(2.15,0)
  rect 2x1.3 smd: G(-4.6,2.29) S(-4.6,-2.29)
  silkscreen extent -4.42,-3.35 -0.45,3.46, body extent -5.08,-3.37 5.02,3.37, height 2.42
TO-263 [mm]
  rect 2.2x3.9 smd: 1(-2.54,-10.6) 3(2.54,-10.6)
  rect 10.2x8 smd: 2(0,0)
  silkscreen extent -5.43,-12.88 5.4,4.4, body extent -5.33,-12.01 5.33,3.25, height 4.98

## Part data
BD1: library part BRIDGE1, "贴片整流桥"
C1 C5 C10 C11 C15 C17 C18 C21 C22 C26 C27 C28 C30 C33 C36 C37: library part CAP, "贴片电容"
C2 C3: library part CAP_EC, "EWH2GM680L300T,D16*L30"
C4: library part CAP_EC, "电解电容"
C6 C7 C13 C20 C23 C29 C31 C32 C34 C35 C38: library part "CAP NP_0", "贴片电容"
C12 C14 C16 C19 C24: library part "CAP NP", "贴片电容"
D1 D2 D3 D4 D5: library part DIO, "二极管"
F1: library part FUSE1, "JFC2410-1200FS"
F+ F- GND L N N+ NL S U V W: library part Pin1, "1Pin"
J1: library part 4PIN, "接插件"
L1: library part INDUCTOR, "电感"
NTC: library part Res, "NTC=10K"
NTC1: library part RES-NTC, "热敏电阻"
NTC2 SW: library part 2PIN, "HCZZ0015-2,2P,1.25mm"
P1: library part 4PIN, "XD-1.0-4PWT,1*4P"
Q1 Q2 Q3 Q4: library part BJT-NPN, "三极管"
R1 R2 R4 R5 R7 R8 R9 R11 R12 R13 R14 R15 R16 R17 R18 R20 R21 R22 R23 R24 R25 R26 R27 R28 R29 R30 R31 R32 R33 R34 R36 R37 R38 R39 R40 R41 R42 R43 R44 R45 R46 R47 R48 R50 R52 R53 R55 R56 R58 R59 R62 R63 R65 R66 R68 R69 R72 R73 R75 R76 R78 R79 R81 R82 R83 R84: library part Res, "电阻"
R51 R54 R57 R60 R61 R64 R67 R70 R71 R74 R77 R80: library part RES
SCR1: library part SCR-BT136D, "可控硅"
U1: "LDO"
U3 U4: library part LTV-354T
U5: library part ORM305x

## Via types
v1: diameter 0.6, hole 0.3, Top Layer to Bottom Layer, tented both sides, 128 vias
v2: diameter 0.8, hole 0.4, Top Layer to Bottom Layer, tented both sides, 40 vias
v3: diameter 1, hole 0.5, Top Layer to Bottom Layer, tented both sides, 17 vias

## Nets (pads, with @x,y where several pads share a name; then routed paths per layer and width w, separated by ;. In a path a pad name is that pad's centre, name@x,y a point inside that pad or via, vN(x,y) a via of type N, cw(c..) or ccw(c..) an arc to the next point about the centre after c; other vN are vias at no path point)
+3V3: 3.3V.1 C7.2 C12.2 C13.2 C14.1 C16.2 C19.2 C20.1 C21.2 C23.1 C24.2 J1.1 NTC2.2 R4.2 R8.1 R14.2 R18.1 R34.1 R45.1 R81.1 R83.1 Tp1.1 Tp5.1 U1.2 U6.1 U6.20 U6.21 U6.24 U6.36 U6.48 | length 149.6
  Top Layer w0.3: U1.2@-7.112,14.289 U1.2@-7.007,14.289 ; C14.1@-4.509,9.906 -4.331,10.084 U6.1@-2.417,10.084 -2.016,10.084 -1.067,11.033 U6.48@-1.067,11.434 -1.067,14.067 -1.224,14.224 C16.2@-1.46,14.224 ; C13.2@-4.402,11.684 C13.2@-4.284,11.684 ; U6.20@2.433,3.234 2.433,1.342 C21.2@2.675,1.1 2.933,1.358 U6.21@2.933,3.234 ; U6.24@4.488,2.825 4.842,2.825 ; U6.24@4.488,3.4 4.488,3.179 4.842,2.825 ; v1(4.6,10.115) 4.631,10.084 U6.36@5.783,10.084 ; v1(5.225,13.55) 6.2,12.575 6.2,10.501 ; C19.2@6.1,2.825 v1(5.2,2.825) 4.842,2.825 ; U6.36@5.783,10.084 6.384,10.084 6.2,10.268 6.2,10.501 ; U6.36@5.783,10.084 6.2,10.501
  Top Layer w0.6: Tp5.1@-26.035,5.207 -25.428,4.6 ; R34.1@-25.138,1.333 -25.138,4.31 ; -24.8,4.648 -24.848,4.6 ; v1(-23.6,4.9) -24.548,4.9 -24.848,4.6 ; R18.1@-4.572,2.858 -4.442,2.858 v1(-3.8,3.5) ; C14.1@-4.509,9.906 -4.509,11.459 C13.2@-4.284,11.684 ; -3.5,22.95 -3.5,18.016 -1.46,15.976 C16.2@-1.46,14.224 ; J1.1@7.588,17.439 9.6,15.427 R4.2@9.6,14.425 ; v1(8.816,11.815) 9.6,11.031 R14.2@9.6,10.731 10.725,10.731 R8.1@11.269,11.275 ; -25.428,4.6 -24.848,4.6 ; -25.428,4.6 -25.138,4.31 ; -25.138,4.31 -24.848,4.6
  Top Layer w1: U1.2@-7.112,14.289 U1.2@-7.112,20.489 3.3V.1@-4.651,22.95 -3.5,22.95 C7.2@-1.8,22.95
  Mid-Layer 2 w0.6: v1(-23.6,4.9) -22.1,6.4 -13.247,6.4 -10.6,9.047 -10.6,14.75 ; -10.2,16.665 -10.6,16.265 ; v1(-9.515,16.9) -10.6,15.815 ; -9.412,16.545 -10.6,15.357 ; -9.254,18.1 -10.6,16.754 -10.6,16.265 ; v1(-8.6,16.75) -10.6,14.75 ; v1(2.6,2.2) 2.6,1.45 3.15,0.9 4.6,0.9 5.5,1.8 5.5,2.525 ; v1(4.6,10.115) 5.5,9.215 5.5,3.125 ; -10.6,14.75 -10.6,15.357 ; -10.6,15.357 -10.6,15.815 ; -10.6,15.815 -10.6,16.265 ; 5.5,2.525 v1(5.2,2.825) 5.5,3.125 ; 5.5,2.525 5.5,3.125
  Bottom Layer w0.3: 5.2,15.6 5.225,15.575 v1(5.225,13.55)
  Bottom Layer w0.6: NTC2.2@-24.004,8.184 -23.6,7.78 v1(-23.6,4.9) ; v1(-8.6,17.725) R81.1@-6.2,17.725 R81.1@-6.225,17.7 ; v1(-3.8,3.5) -3.8,3 -3.2,2.4 2.4,2.4 v1(2.6,2.2) ; v1(-3.5,19.2) -3.5,18.2 -0.9,15.6 5.2,15.6 ; C24.2@2.304,-0.772 2.304,0.946 2.15,1.1 2.6,1.55 v1(2.6,2.2) ; R45.1@2.6,4.075 v1(2.6,2.2) ; R83.1@2.8,10.925 5.125,10.925 7.588,13.388 7.588,13.7 ; v1(5.2,2.825) 5.8,2.225 C20.1@5.8,1.1 ; J1.1@7.588,17.439 7.588,13.7 ; v1(8.816,11.815) 8.816,12.472 7.588,13.7
  other v1: -9.8,17.9 -8.212,18.5 -9.254,18.7
+12V: 12V.1 C4.1 C5.1 C29.1 C30.2 C32.1 C33.2 C35.1 C37.2 D1.A L1.2 R2.2 R26.1 R27.1 R46.1 R51.1 R61.1 R71.1 U7.1 U8.1 U9.1 | length 141.4
  Top Layer w0.6: R27.1@-27,-9.7 -27,-8.365 -25.835,-7.2 v1(-23.1,-7.2) v1(-22.3,-7.2) -21.1,-8.4 R26.1@-21.1,-9 ; D1.A@-25.2,8.6 -25.2,8.082 -22.918,5.8 -19.8,5.8 -19.45,5.45 ; -19.6,3.2 -19.45,3.35 -19.45,5.45 ; C4.1@-18.443,3.937 -18.443,1.442 L1.2@-16.012,-0.989 ; C4.1@-18.2,4.2 -19.45,5.45 ; R46.1@-8.525,4.3 -9.982,5.757 R2.2@-9.982,6.604 ; U7.1@-5.795,-8.505 -5.795,-7.595 -5.275,-7.075 -5.275,-4.685 -4.99,-4.4 R51.1@-3,-4.4 ; R51.1@-3,-4.2 -1.8,-4.2 -0.6,-5.4 v1(-0.6,-6.323) ; U8.1@4.953,-8.381 4.953,-6.657 C33.2@4.519,-6.223 4.519,-4.67 C32.1@4.744,-4.445 v1(5.699,-4.445) 6.655,-4.445 R61.1@6.8,-4.3 ; v1(14.4,-9.5) 15.113,-8.787 U9.1@15.113,-7.103 15.113,-6.313 13.499,-4.699 C37.2@13.144,-4.699 13.144,-3.019 C35.1@13.369,-2.794 15.256,-2.794 R71.1@15.367,-2.683 ; R2.2@-9.982,6.604 -9.486,7.1 v1(-8.9,7.1) v1(-8.9,6.2) -9.578,6.2 R2.2@-9.982,6.604
  Mid-Layer 1 w0.6: C4.1@-18.443,3.937 -18.443,0.257 -22.5,-3.8 -22.5,-6.6 ; v1(-0.6,-6.323) -0.6,-11.4 ; v1(5.699,-4.445) 5.699,-9 ; v1(14.4,-9.5) 6.399,-9.5 ; -22.6,-6.7 -22.5,-6.6 ; -22.6,-6.7 v1(-23.1,-7.2) v1(-22.3,-7.2) ; -22.6,-6.7 -22.6,-6.9 v1@-22.5,-7 ; v1@-22.5,-7 v1(-22.3,-7.2) ; v1@-22.5,-7 -22.5,-6.6 ; v1(-22.3,-7.2) -17.4,-12.1 -1.2,-12.1 ; -1.2,-12.1 -0.6,-11.5 ; -1.2,-12.1 -0.6,-12.1 ; -0.6,-12.1 -0.6,-11.5 ; -0.6,-12.1 0.1,-12.1 ; -0.6,-11.5 -0.6,-11.4 ; -0.6,-11.4 0.1,-12.1 ; 0.1,-12.1 3.799,-12.1 5.699,-10.2 ; 5.699,-10.2 6.399,-9.5 ; 5.699,-10.2 5.699,-9.5 ; 5.699,-9.5 5.699,-9 ; 5.699,-9.5 6.199,-9.5 ; 5.699,-9 6.199,-9.5 ; 6.199,-9.5 6.399,-9.5
  Bottom Layer w1: C4.1@-18.443,3.937 -16.18,6.2 -9.8,6.2 ; -9.8,6.2 v1(-8.9,7.1) v1(-8.9,6.2) -9.8,6.2
COMP4_INP: U6.16 U6.17 | length 2.6
  Top Layer w0.25: U6.16@0.433,3.234 0.433,4.233 0.559,4.359 0.859,4.359 0.933,4.285 U6.17@0.933,3.234
DAC1_OUT1: R30.1 U6.12 | length 2.2
  Top Layer w0.25: R30.1@-2.921,2.603 -2.921,2.73 -2.3,3.351 U6.12@-2.3,4.584
GND: BD1.4 C2.2 C3.2 C4.2 C5.2 C6.1 C7.1 C10.2 C11.2 C12.1 C13.1 C14.2 C15.2 C16.1 C17.1 C18.2 C19.1 C20.2 C21.1 C22.2 C23.2 C24.1 C26.2 C27.2 C28.1 C29.2 C30.1 C32.2 C33.1 C35.2 C36.2 C37.1 D2.A GND-1.1 GND.1 J1.4 NTC.2 Q1.E Q2.E Q3.E Q4.E R17.2 R21.2 R22.2 R32.1 R33.2 R37.2 R47.1 R48.1 R50.1 R53.2 R58.2 R63.2 R68.2 R73.2 R78.2 R80.1 R82.2 R84.2 SW.1 Tp4.1 U1.1 U3.3 U4.3 U6.19 U6.23 U6.35 U6.47 U7.4 U8.4 U9.4 | length 358.3
  Top Layer w0.25: C18.2@-0.224,-2.476 C18.2@-0.127,-2.476 ; U6.19@1.933,3.234 1.933,4.047 2.245,4.359 3.68,4.359 3.933,4.106 U6.23@3.933,3.234 v1(3.933,2.1) 3.933,1.492 C21.1@4.325,1.1 ; 4.778,9.392 4.714,9.328 ; U6.35@5.783,9.584 4.97,9.584 4.714,9.328 ; 4.714,9.328 4.586,9.2 v1(4.361,9.2) 4.361,9.328 4.714,9.328
  Top Layer w0.3: v1@-9.412,11.8 v1@-9.296,11.684 ; C14.2@-6.159,9.906 -6.159,8.609 -5.614,8.064 C15.2@-4.572,8.064 ; U6.47@-0.567,11.434 -0.567,13.467 C16.1@0.19,14.224 ; U6.35@5.783,9.584 7.108,9.584 C11.2@7.874,10.35 7.05,11.174 7.05,14.425
  Top Layer w0.5: Q4.E@-20.453,-19.028 R37.2@-19.086,-19.028 ; R37.2@-18.934,-19.18 -18.934,-17.334 -14.05,-12.45 v1(-14.05,-10.676) ; Q2.E@-16.425,-8.043 -14.997,-8.043 R22.2@-14.9,-8.14 ; GND-1.1@-12.3,26.6 -10.832,26.6 C2.2@-9.515,25.283 ; v1(-2.1,19.8) -2.1,19.507 -1.4,18.807 ; -1.8,19.8 -1.4,19.4 ; v1(-1.4,19.8) -1.4,19.4 ; Tp4.1@-0.067,19.5 -0.032,19.465 J1.4@-0.032,17.439 ; C16.1@0.19,14.224 -0.032,14.446 J1.4@-0.032,17.439 ; v1(6.2,16.4) C12.1@6.2,14.425 7.05,14.425 C10.2@7.9,14.425 ; U4.3@13.01,11.176 14.06,12.226 14.06,13.265 13.4,13.925 ; U3.3@13.01,14.224 13.101,14.224 13.4,13.925 ; v1(13.4,17.3) 13.4,13.925 ; 13.625,13.7 13.4,13.925 ; -1.4,18.807 J1.4@-0.032,17.439 ; -1.4,18.807 -1.4,19.4
  Top Layer w0.6: C22.2@-23.487,1.333 v1(-23.487,2.157) ; R37.2@-19.086,-19.028 R37.2@-18.934,-19.18 ; Q2.E@-16.425,-8.043 -16.2,-7.818 v1(-16.2,-7.3) ; U7.4@-9.605,-8.505 -9.605,-6.905 -8.9,-6.2 v1(-7.912,-6.2) -6.925,-6.2 C30.1@-6.925,-6.1 C29.2@-6.925,-4.747 ; v1@-9.412,11.8 -6.5,11.8 C13.1@-6.384,11.684 -6.159,11.459 C14.2@-6.159,9.906 ; v1(-9.385,1.4) -8.925,1.4 R50.1@-8.5,0.975 -6.88,0.975 C27.2@-6.858,0.953 ; C29.2@-7.181,-4.491 C29.2@-6.925,-4.747 ; R53.2@-5.245,-2.476 R58.2@-6.896,-2.476 -6.896,-4.718 C29.2@-6.925,-4.747 ; R32.1@-1.932,-2.476 -1.932,-2.635 0.033,-4.6 2.489,-4.6 C32.2@2.644,-4.445 ; v1(-1,-1.7) C18.2@-0.224,-2.476 ; v1(0.5,-8) v1@0.762,-8 ; R48.1@4.1,21.275 R47.1@2.5,21.275 C26.2@0.9,21.275 -1.025,21.275 C7.1@-1.625,20.675 ; C21.1@4.325,1.1 6.025,1.1 C19.1@6.1,1.175 ; R63.2@5.2,-2.425 5.197,-2.422 R68.2@3.429,-2.422 2.751,-3.1 2.751,-4.338 C32.2@2.644,-4.445 ; R17.2@7.875,2.9 7.875,2.525 8.6,1.8 Q1.E@10.775,1.8 ; v1(8,-3.244) 10.819,-3.244 C35.2@11.269,-2.794 ; R78.2@10.392,-0.952 v1@11.2,-0.952 ; Q1.E@11.125,2.15 Q1.E@10.775,1.8 ; U9.4@11.303,-7.103 11.303,-2.828 C35.2@11.269,-2.794 ; R73.2@12.17,-0.952 v1@11.2,-0.952 ; v1(15.1,0.5) 15.1,1.275 14.575,1.8 Q1.E@10.775,1.8 ; C7.1@-2.1,20.2 C7.1@-1.8,20.5 ; C7.1@-2.1,20.2 v1(-2.1,19.8) -1.8,19.8 ; C7.1@-2.1,20.2 -2.1,20.55 C7.1@-1.8,20.85 ; -1.8,19.8 v1(-1.4,19.8) -1.4,20.45 C7.1@-1.625,20.675 ; -1.8,19.8 C7.1@-1.8,20.5 ; C7.1@-1.8,20.5 C7.1@-1.8,20.85 ; C7.1@-1.8,20.5 C7.1@-1.625,20.675 ; C7.1@-1.8,20.85 C7.1@-1.625,20.675 ; v1@0.762,-8 U8.4@1.143,-8.381 U8.4@1.143,-7.657 ; v1@0.762,-8 0.8,-8 U8.4@1.143,-7.657 ; U8.4@1.143,-7.657 1.143,-6.857 1.777,-6.223 C33.1@2.869,-6.223 2.644,-5.998 C32.2@2.644,-4.445 ; v1@11.2,-0.952 11.269,-1.021 C35.2@11.269,-2.794
  Top Layer w1: C6.1@-10.131,9.075 -10.131,9.653 -9.412,10.372 v1(-9.412,10.8) -9.412,11.8 U1.1@-9.412,14.289
  Mid-Layer 1 w0.5: J1.4@-0.032,17.439 1.746,15.661 6.2,15.661 ; v1(6.2,16.4) 6.2,15.661 ; 8.2,14.869 8.992,15.661 ; 8.6,15.925 8.864,15.661 ; v1(13.4,17.3) 13.4,16.3 12.761,15.661 8.992,15.661 ; 6.2,15.661 8.864,15.661 ; 8.864,15.661 8.992,15.661
  Mid-Layer 1 w0.6: v1(-23.487,2.157) -23.487,2.393 C4.2@-21.943,3.937 ; v1(-2.9,15.925) -1.546,15.925 J1.4@-0.032,17.439 ; v1(4.325,-2.4) 5.169,-3.244 v1(8,-3.244)
  Mid-Layer 1 w1: v1(-9.412,10.8) -9.412,13.488 ; -6.012,18.4 -4.112,20.3 -2.3,20.3 -1.7,19.7
  Mid-Layer 2 w0.6: v1(-16.2,-7.3) -16.2,-9.6 -15.124,-10.676 v1(-14.05,-10.676) -13.126,-11.6 -10.3,-11.6 -6.7,-8 ; v1(-9.385,1.4) -8.1,1.4 -6.4,-0.3 -6.4,-5.6 ; v1(-7.912,-6.2) -7,-6.2 ; -4.8,-8 -5.15,-8 ; v1(-1,-1.7) 3.625,-1.7 v1(4.325,-2.4) ; v1(0.5,-8) -5.15,-8 ; v1(3.933,2.1) 3.933,3.033 4.7,3.8 4.7,8.861 v1(4.361,9.2) ; -7,-6.2 -6.4,-5.6 ; -7,-6.2 -6.95,-6.2 ; -6.95,-6.2 -6.4,-6.2 ; -6.95,-6.2 -6.4,-6.75 ; -6.7,-8 -6.4,-7.7 -6.4,-7.395 ; -6.7,-8 -5.795,-8 ; -6.4,-7.395 -5.795,-8 ; -6.4,-7.395 -6.4,-6.75 ; -6.4,-6.75 -6.4,-6.2 ; -6.4,-6.75 -6.4,-6.2 ; -6.4,-6.2 -6.4,-5.6 ; -5.795,-8 -5.15,-8
  Mid-Layer 2 w2: -25.2,-1.5 -25.2,-2.5 ; -25.2,-4.4 -25.2,-2.5 ; -25.2,-4.4 v3@-23.846,-5.754 ; -25.2,-4.4 v3(-25.2,-5.8) v3(-23.8,-5.8) v3@-23.846,-5.754 ; -25.2,-2.5 -25.2,7.82 C3.2@-18.151,14.869 -18.151,20.949 GND.1@-14.6,24.5 ; -25.2,-2.5 -23.846,-3.854 v3@-23.846,-5.754 ; GND.1@-14.6,24.5 -10.298,24.5 C2.2@-9.515,25.283 ; GND.1@-14.6,24.5 -13.817,25.283 C2.2@-9.515,25.283 ; C2.2@-9.515,25.283 7.617,25.283 8.6,24.3 ; 8.6,24.3 v3(9.4,23.5) 9.4,23.1 v3(8.6,22.3) 8.6,24.3
  Bottom Layer w0.3: R84.2@4.325,7.5 R84.2@4.45,7.625 ; v1(4.361,9.2) v1@4.45,9.111
  Bottom Layer w0.5: R84.2@4.325,7.5 4.361,7.5 5.45,6.411 5.45,5.025 C28.1@4.5,4.075
  Bottom Layer w0.6: SW.1@-25.755,0.117 -24.283,0.117 -23.487,0.913 v1(-23.487,2.157) ; -23.2,-4.2 -22.8,-4.2 v1(-21.6,-5.4) -22.1,-5.9 R80.1@-22.8,-5.9 ; R21.2@-23,12.297 C17.1@-21.246,12.297 -9.782,12.297 ; Q3.E@-9.025,2.25 -9.025,1.76 ; R33.2@-7.5,0.275 -8.439,0.275 -9.025,0.861 ; R82.2@-4.425,15.925 v1(-2.9,15.925) ; NTC.2@0.5,-8.775 v1(0.5,-8) ; C24.1@3.854,-0.872 C24.1@4.325,-1.343 ; C23.2@4.25,1.1 C23.2@3.954,0.804 ; v1(4.325,-2.4) C24.1@4.325,-1.343 ; C28.1@4.5,4.075 3.933,3.508 v1(3.933,2.1) 3.933,0.825 C23.2@3.954,0.804 ; C20.2@6.2,-0.85 6.122,-0.772 4.8,-0.772 ; v1(11.3,-0.9) 12.7,0.5 v1(15.1,0.5) ; -9.782,12.297 v1(-9.385,11.9) -9.385,12.71 v1(-9.4,12.725) -9.4,12.679 -9.782,12.297 ; v1(-9.385,1.4) -9.025,1.4 ; v1(-9.385,1.4) -9.385,1.221 -9.025,0.861 ; v1(-9.385,1.4) -9.025,1.76 ; -9.025,0.861 -9.025,1.4 ; -9.025,1.4 -9.025,1.76 ; C23.2@3.954,0.804 3.954,-0.772 4.8,-0.772 ; C24.1@4.325,-1.343 4.325,-1.247 4.8,-0.772
  Bottom Layer w1: -24.1,-5 -21.943,-2.843 C4.2@-21.943,3.937
  other v1: -25.6,-4.6 -23.4,-4.6 -23.4,-3.5 -25.6,-3.244
IB: Q10.S R24.2 R29.1 R40.2 R60.1 R70.1 R79.2 R80.2 | length 116
  Top Layer w0.5: v1(-1.757,1.1) R24.2@-0.925,1.1
  Mid-Layer 1 w0.25: v1(-20.45,-5.4) -20.45,-6.75 -19.096,-8.104 -4.111,-8.104 -3.1,-7.093 -3.1,-0.243 v1(-1.757,1.1) ; v1(-13.1,-6.9) -12.475,-7.525 -10.625,-7.525 -6.5,-3.4 -6.5,9.089 -4.064,11.525 v1(-2.775,11.525)
  Mid-Layer 2 w0.25: v1(-4.318,-7.2) -3,-7.2 -2.45,-6.65 -2.45,-0.918 2.15,3.682 2.15,8.8 1.65,9.3 -1.7,9.3 -2.6,10.2 v1(-2.6,10.825)
  Bottom Layer w0.25: -5.6,-3.8 -5.333,-4.067 R70.1@-5.333,-6.604 ; v1(-2.775,11.525) R29.1@-2.775,12.5 ; R40.2@-2.6,9.009 v1@-2.6,10.725 ; R79.2@7.621,-9.393 9.358,-9.393 Q10.S@9.386,-9.365
  Bottom Layer w0.3: R60.1@-13.462,-6.7 v1@-13.1,-6.7 ; v1(-4.318,-7.2) -4.318,-5.318 -3.4,-4.4
  Bottom Layer w0.6: -19.5,-4.25 -19.5,-4.45 v1(-20.45,-5.4) -19.85,-6 R80.2@-19.3,-6 ; -15,-6.9 v1(-13.1,-6.9) R60.1@-13.661,-6.339 ; R60.1@-14.023,-6.139 R60.1@-13.661,-6.139
  Bottom Layer w2: R80.2@-19.55,-5.4 -14.762,-5.4 ; -4.15,-3.8 -5.6,-3.8 -13.162,-3.8 -14.023,-4.661 ; -14.762,-5.4 R60.1@-14.023,-6.139 -14.023,-4.661 ; -14.762,-5.4 -14.023,-4.661
KEY: C22.1 R34.2 SW.2 Tp8.1 U6.5 | length 33.5
  Top Layer w0.25: v1@-3.666,8.084 v1(-3.566,8.084) U6.5@-2.417,8.084
  Top Layer w0.5: Tp8.1@-27.2,1.722 -27.2,0.2 -26.683,-0.317 R34.2@-25.138,-0.317 C22.1@-23.487,-0.317 -23.459,-0.345 v1(-23.459,-1.133)
  Mid-Layer 2 w0.25: v1(-23.459,-1.133) -20.133,-1.133 -14,5 -6.65,5 v1(-3.566,8.084)
  Bottom Layer w0.25: SW.2@-25.755,-1.133 v1(-23.459,-1.133)
L: F1.1 L.1 NL.1 R7.1 R11.2 R12.1 SCR1.1 | length 61.9
  Top Layer w3: L.1@28.067,0.381 28.067,-3.867 NL.1@28.1,-3.9
  Mid-Layer 2 w0.3: v1(12.15,16.75) 12.15,12.45 17.6,7 17.6,-0.2 ; 17.6,-1.6 17.6,-0.2 ; 17.6,0.4 17.6,-0.2 ; v3(18.3,-0.9) 17.6,-0.2
  Mid-Layer 2 w2: NL.1@28.067,-3.867 NL.1@28.1,-3.9 ; 28.067,-1.8 L.1@28.067,0.381
  Mid-Layer 2 w3: 18.6,-1.8 25.886,-1.8 ; NL.1@28.067,-3.867 28.067,-1.8 25.886,-1.8 ; 25.886,-1.8 L.1@28.067,0.381 28.1,0.348 NL.1@28.1,-3.9 27.986,-3.9 25.886,-1.8
  Bottom Layer w0.3: R12.1@12.15,12.9 R7.1@12.15,15.4 v1(12.15,16.75)
  Bottom Layer w2: NL.1@28.067,-3.867 NL.1@28.1,-3.9
  Bottom Layer w3: NL.1@28.067,-3.867 28.067,-1.8 ; 28.067,-1.6 L.1@28.067,0.381 F1.1@28.067,3.6
  other v3: 19.6,-0.9 20.9,-0.9
LEDB: R36.2 U6.4 | length 46.4
  Top Layer w0.25: R36.2@-17.156,-19.18 -17.156,-16.756 -12.1,-11.7 v1(-12.1,-10.6) ; U6.4@-2.417,8.584 -1.21,8.584 -1.026,8.4 v1(0.1,8.4)
  Mid-Layer 2 w0.25: v1(-12.1,-10.6) -12.8,-10.6 -14.3,-9.1 -14.3,-0.2 -11.4,2.7 -0.5,2.7 0.6,3.8 0.6,7.9 v1(0.1,8.4)
LEDG: R31.2 U6.3 | length 12.7
  Top Layer w0.25: v1(-5.5,8.9) -3.7,8.9 -3.516,9.084 U6.3@-2.417,9.084
  Mid-Layer 1 w0.25: v1@-5.769,1.047 v1(-5.8,1.047) -5.175,1.672 -5.175,2.439 -5.9,3.164 -5.9,8.5 v1(-5.5,8.9)
  Bottom Layer w0.25: R31.2@-5.9,0.425 R31.2@-5.7,0.225 ; R31.2@-5.8,0.425 v1(-5.8,1.047)
LEDR: R20.2 U6.2 | length 32.9
  Top Layer w0.25: R20.2@-13.2,-8.14 -11.96,-8.14 -10.6,-9.5 v1(-10.6,-10.5) ; U6.2@-2.417,9.584 -1.442,9.584 v1(-1.026,10)
  Mid-Layer 1 w0.25: v1(-7.5,-7.1) -6.535,-7.1 -3.7,-4.265 -3.7,2.4 -4.7,3.4 -4.7,6.3 -3.8,7.2 -2.457,7.2 -1.026,8.631 v1(-1.026,10)
  Mid-Layer 2 w0.25: v1(-10.6,-10.5) -10.6,-9.9 -9,-8.3 -8.1,-8.3 -7.5,-7.7 v1(-7.5,-7.1)
N: F+.1 N+.1 N.1 NTC1.1 R5.1 | length 67.9
  Top Layer w3: N+.1@23.3,-9.4 25,-11.1 F+.1@25,-13 25,-15.513 N.1@23.876,-16.637
  Mid-Layer 1 w2: N+.1@23.3,-9.4 N+.1@23.306,-9.394
  Mid-Layer 1 w3: N+.1@23.3,-9.4 25,-11.1 F+.1@25,-13 25,-15.513 N.1@23.876,-16.637 ; N+.1@23.306,-9.394 NTC1.1@23.306,-5.278
  Mid-Layer 2 w0.3: v1(10.3,19.4) 11.303,18.397 11.303,11.197 12.3,10.2 12.3,-1.6 15.978,-5.278 NTC1.1@23.306,-5.278
  Bottom Layer w0.3: v1(10.3,19.4) 10.3,21.4 11.2,22.3 R5.1@12.15,22.3
  Bottom Layer w3: N+.1@23.3,-9.4 25,-11.1 F+.1@25,-13 25,-15.513 N.1@23.876,-16.637
NetBD1_2: BD1.2 F1.2 | length 19.5
  Mid-Layer 2 w2: v3(21.64,20.85) v3(22.69,19.65) 25.62,15.73 27.36,12.28 27.36,10.95 ; 27.38,10.97 27.36,10.95 ; 27.36,10.95 27.36,9.44 25.69,7.77 25.69,9.28 25.73,9.32 27.36,10.95
  other v3: 25.28,7.7 25.72,9.05
NetBD1_3: BD1.3 NTC1.2 | length 27.2
  Mid-Layer 1 w2: v3(18.78,17.16) 24.15,17.16 25.86,15.45 27.97,11.24 27.97,5.92 24.525,2.475 ; 24.525,2.475 23.359,2.475 22.606,1.722 23.772,1.722 24.525,2.475
  other v3: 20.34,17.1
NetC1_1: C1.1 D1.K U2.4 | length 11.2
  Top Layer w0.6: D1.K@-21.057,8.509 -20.232,9.334 C1.1@-18.2,9.334 ; C1.1@-18.2,9.559 -17.85,9.209 -16.846,9.209 -16.321,8.684 -13.384,8.684 -12.192,7.492 U2.4@-12.192,6.35